# Allegro board 210112.brd
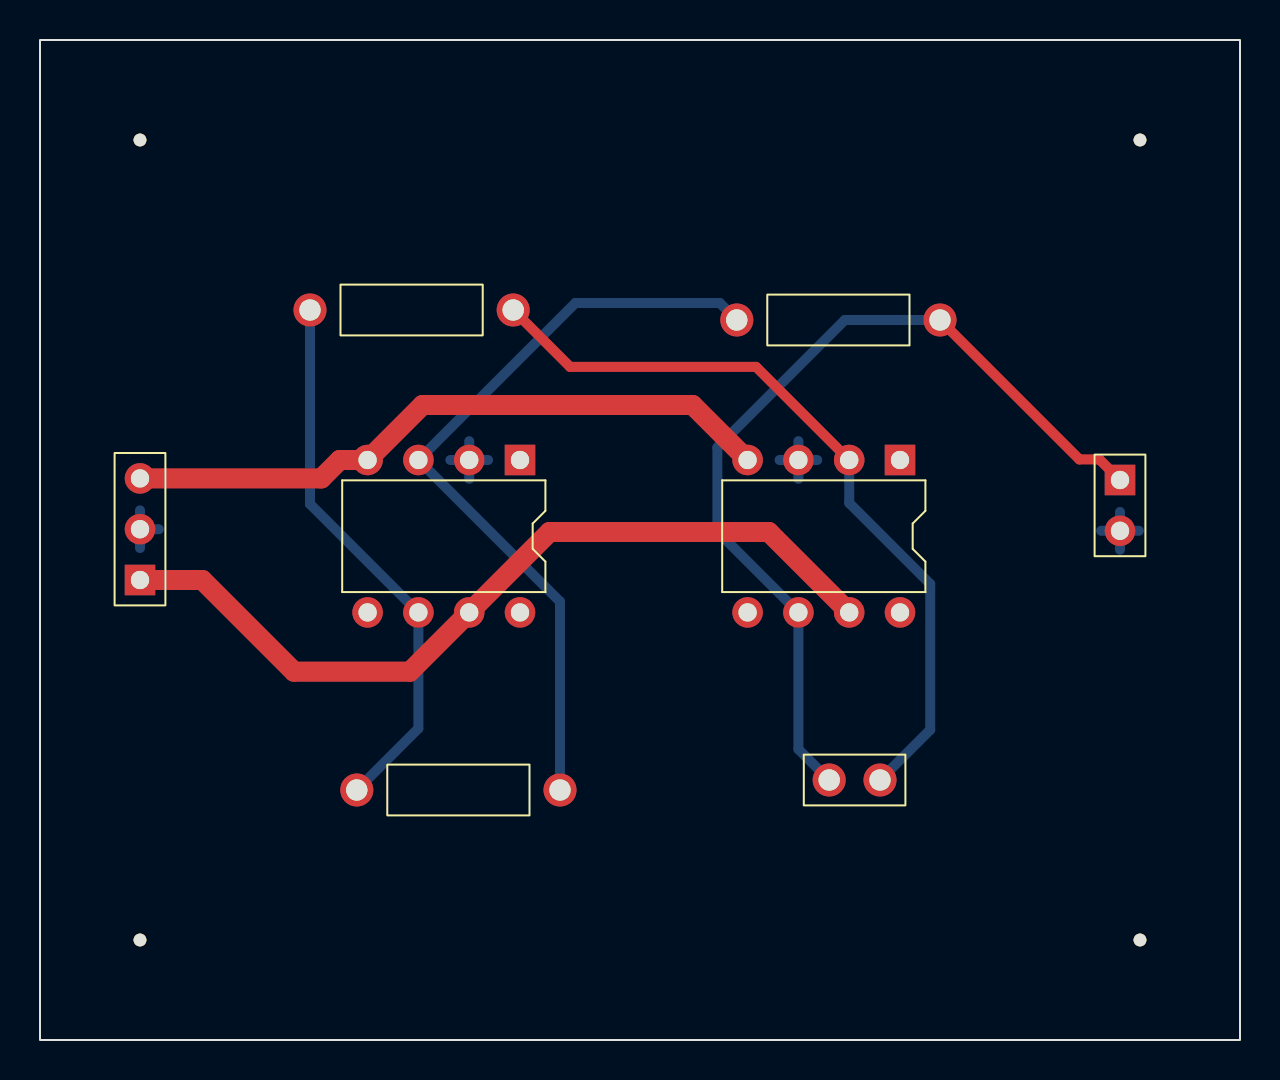
[diagram p0: board, top side]
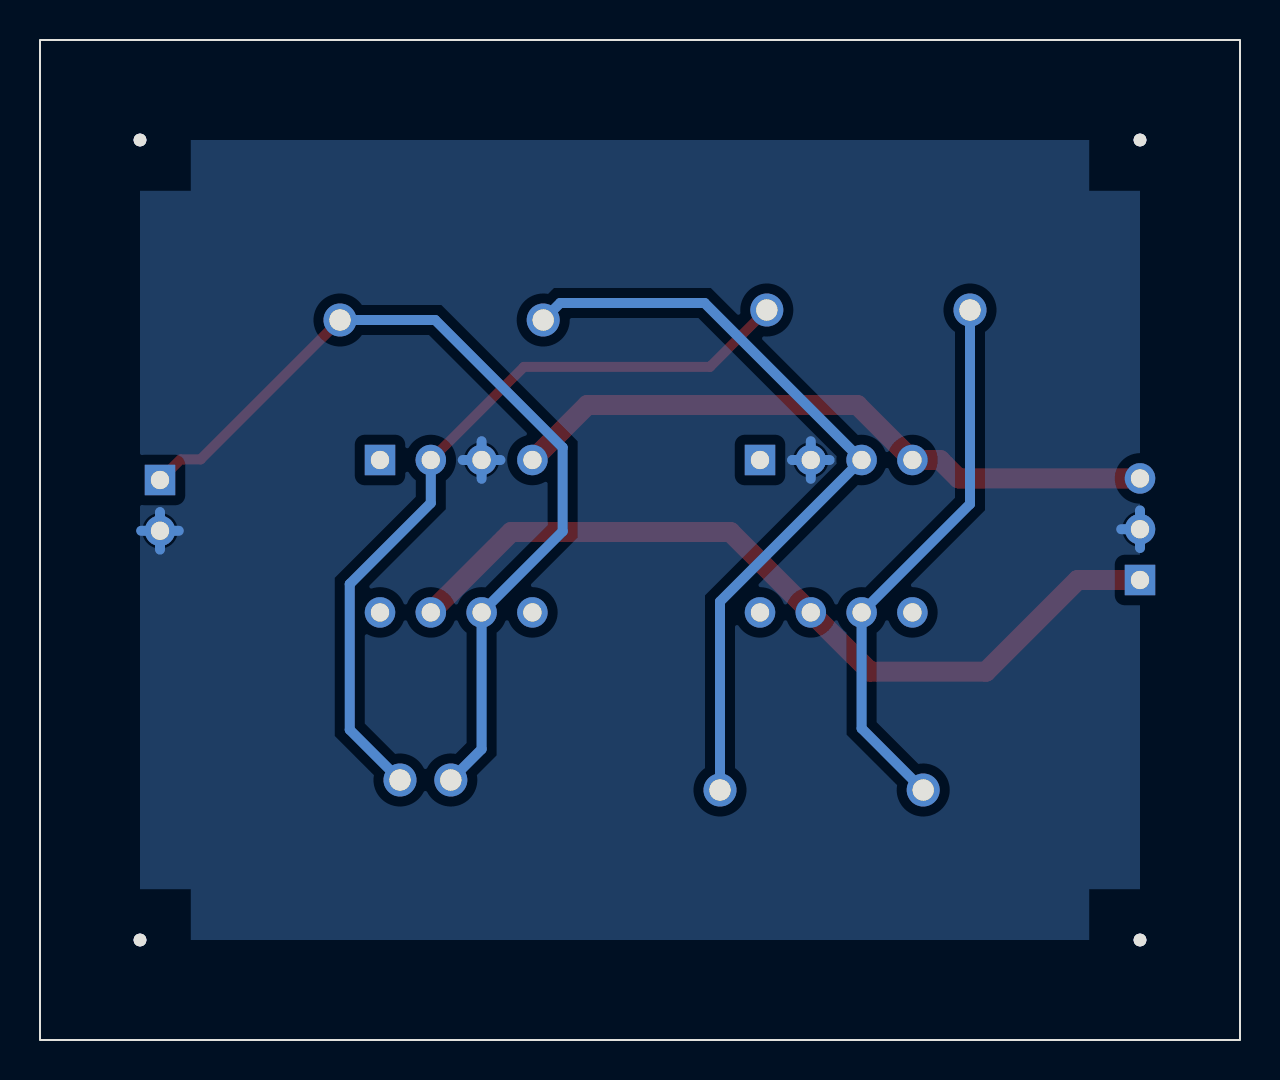
[diagram p1: board, bottom side, seen from below]

Outline 60 x 50 mm; copper layers: TOP, BOTTOM. Coordinates in mm from the lower left corner of the outline.
Outline path: rectangle 0,0 60,50

## Design rules (mm)
constraint set DEFAULT: min track width 0.5
nets with their own width: min track width 1; nets +12V -12V GND

## Placement (name value [footprint] x y rotation side)
C1  0.01uF  [CAPCK05]  42 13 90 top
J1  CON2  [JUMPER2]  54 28 270 top
J2  CON3  [JUMPER3]  5 23 90 top
NOREF  -  [unnamed]  55 5 0 top
NOREF#2  -  [#2]  5 45 0 top
NOREF#3  -  [unnamed]  55 45 0 top
NOREF#4  -  [#2]  5 5 0 top
NOREF#5  -  [#2]  55 5 90 top
NOREF#6  -  [unnamed]  5 45 0 top
NOREF#7  -  [unnamed]  5 5 0 top
NOREF#8  -  [#2]  5 5 90 top
R1  2.7K  [RES400]  13.5 36.5 270 top
R2  20K  [RES400]  26 12.5 90 top
R3  10K  [RES400]  45 36 90 top
U1  LF356  [DIP8_3]  24 29 270 top
U2  LF356  [DIP8_3]  43 29 270 top

## Library data of the parts
C1 = CAP NP: Tolerance: ***; User Part Number: ***
J1 = CON2: User Part Number: ***
J2 = CON3_0: User Part Number: ***
R1-R3 = R: Tolerance: ***; User Part Number: ***
U1 = LF356_6: Tolerance: ***; User Part Number: ***
U2 = LF356_7: Tolerance: ***; User Part Number: ***

## Footprints (pads in the part's own frame, mm; a bottom-side part is the same pattern mirrored in y, then rotated)
CAPCK05
  round 1.651 hole 1.067: 1(0,0) 2(0,2.54)
DIP8_3
  rect 1.524x1.524 hole 0.914: 1(0,0)
  round 1.524 hole 0.914: 2(0,-2.54) 3(0,-5.08) 4(0,-7.62) 5(7.62,-7.62) 6(7.62,-5.08) 7(7.62,-2.54) 8(7.62,0)
JUMPER2
  rect 1.524x1.524 hole 0.914: 1(0,0)
  round 1.524 hole 0.914: 2(2.54,0)
JUMPER3
  rect 1.524x1.524 hole 0.914: 1(0,0)
  round 1.524 hole 0.914: 2(2.54,0) 3(5.08,0)
RES400
  round 1.651 hole 1.067: 1(0,0) 2(0,10.16)
unnamed
  round 0.635 hole 3.175 unplated: (0,0)

## Nets
+12V: J2.1 U1.7 U2.7
-12V: J2.3 U1.4(V-) U2.4(V-)
GND: J1.2 J2.2 U1.2 U2.3
N00244: C1.1 R1.2 U2.2
N00248: R1.1 R2.2 U1.6
N00265: C1.2 J1.1 R3.1 U2.6
N00309: R2.1 R3.2 U1.3

Pads without a net: U1 1 5 8; U2 1 5 8

## Routing (per net, layer and track width the routed paths; a pad name or vN(x,y) marks a point on that pad's centre or on a via; arc(x,y) is an arc through that point)
+12V: length 41.9
  TOP w1: J2.1 8.12,23 12.7,18.41 18.5,18.41 U1.7 25.48,25.4 36.44,25.4 U2.7
-12V: length 33
  TOP w1: J2.3 14.07,28.08 14.99,29 U1.4 19.13,31.75 32.63,31.75 U2.4
GND: length 14.1
  BOTTOM w0.5: U2.3 37.92,29.94 ; U2.3 36.98,29 ; U2.3 37.92,28.06 ; U2.3 38.86,29 ; 53.06,25.46 J1.2 ; J1.2 54,24.52 ; J1.2 54,26.4 ; J1.2 54.94,25.46 ; 21.46,28.06 U1.2 ; U1.2 21.46,29.94 ; U1.2 22.4,29 ; U1.2 20.52,29 ; J2.2 5.94,25.54 ; J2.2 5,26.48 ; J2.2 5,24.6
N00244: length 38.6
  TOP w0.5: R1.2 26.5,33.66 35.8,33.66 U2.2
  BOTTOM w0.5: C1.1 44.51,15.51 44.51,22.8 40.46,26.85 U2.2
N00248: length 27.5
  BOTTOM w0.5: R1.1 13.5,26.8 U1.6 18.92,15.58 R2.2
N00265: length 45
  TOP w0.5: J1.1 52.97,29.03 51.97,29.03 R3.1
  BOTTOM w0.5: C1.2 37.92,14.54 U2.6 33.87,25.43 33.87,29.63 40.24,36 R3.1
N00309: length 39
  BOTTOM w0.5: R2.1 26,21.92 U1.3 26.77,36.85 33.99,36.85 R3.2

## Copper pours and planes (outline as drawn; the poured copper is in the pictures)
GND on BOTTOM: 5,5 5,45 55,45 55,5

## Text on the board
DIMENSION: FIGURE | FINISHED_SIZE | 0.3302 | 0.9144 | 1.0668 | 3.175 | DRILL CHART: TOP to BOTTOM | ALL UNITS ARE IN MILLIMETERS | PLATED | NON-PLATED | QTY | 2 | 21 | 8 | 4
